# EAGLE board infra vector v2 (EAGLE 9.7.0)
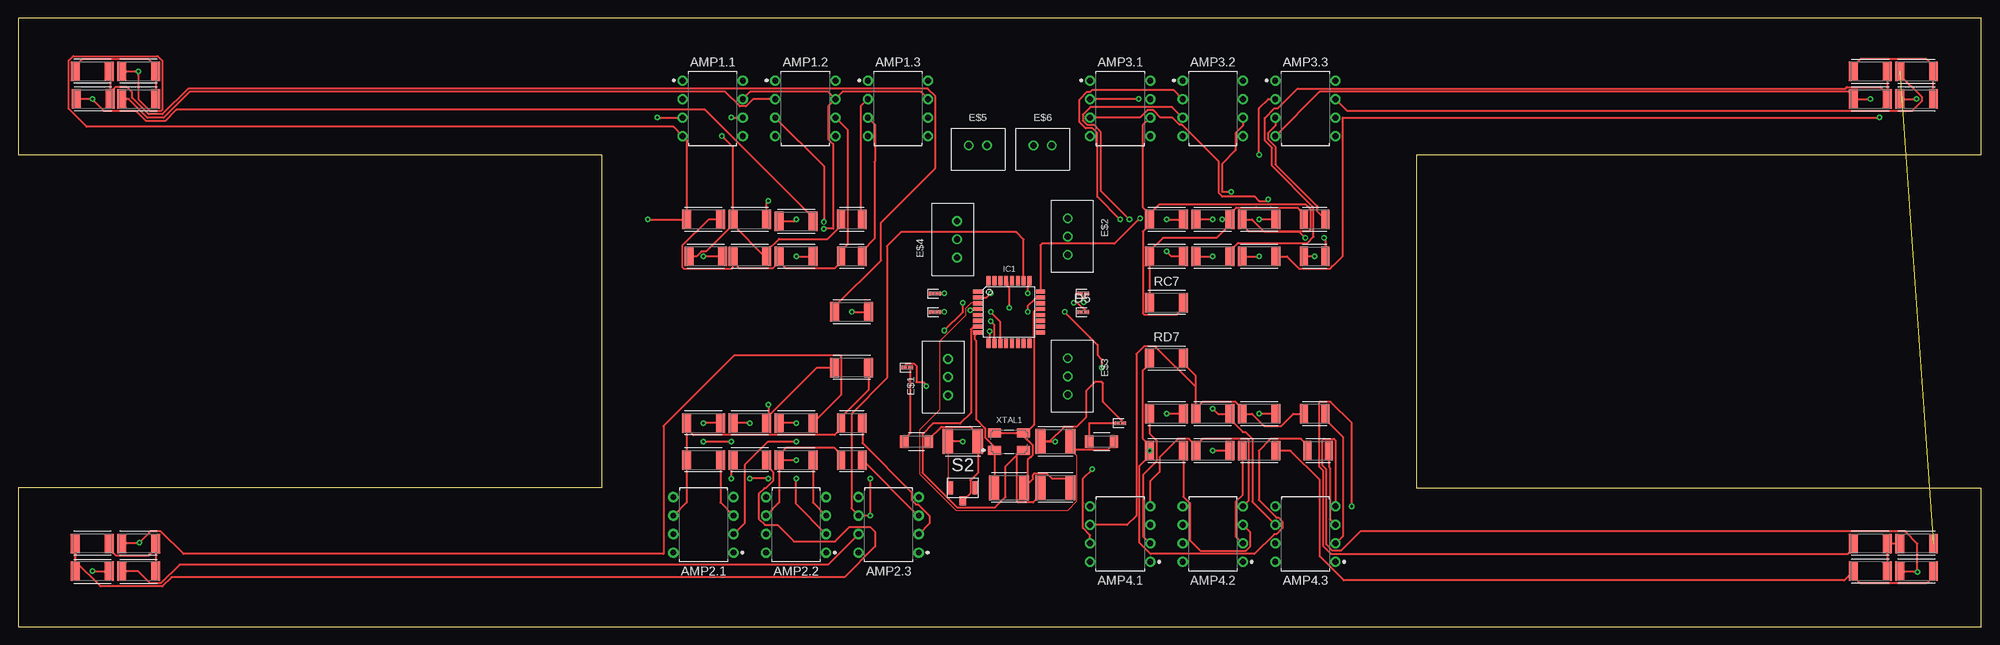
[diagram p0: board, top side]
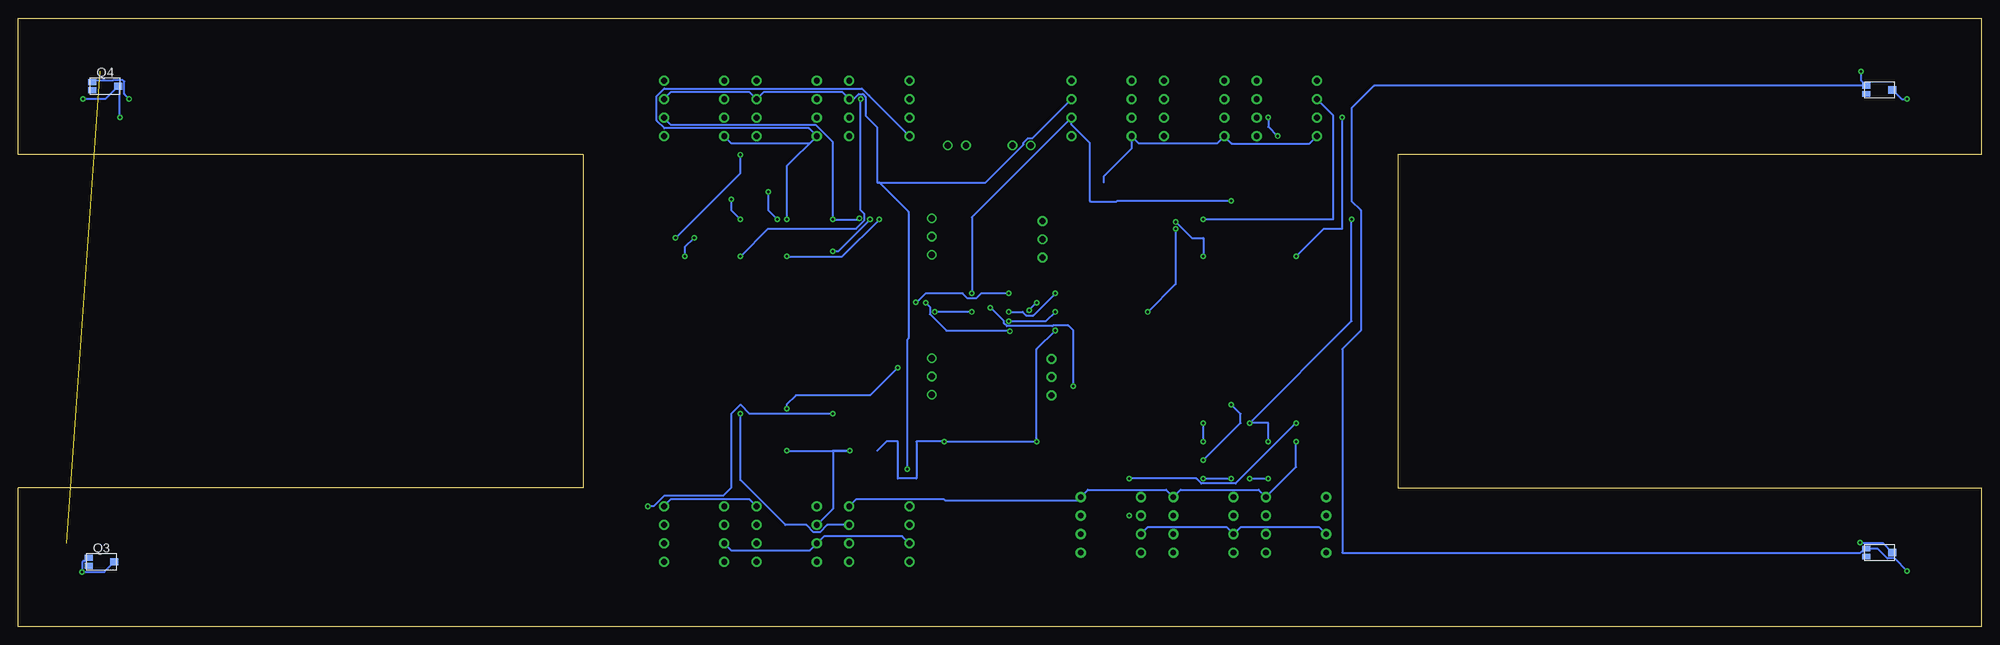
[diagram p1: board, bottom side, seen from below]

Size 269.22 x 83.49 mm. Coordinates in mm from the lower left corner, seen from the top.
Outline: 0,0 269.22,0 269.22,19.05 191.77,19.05 191.77,64.77 269.22,64.77 269.22,83.49 0,83.49 0,64.77 80.01,64.77 80.01,19.05 0,19.05 0,0
Copper layers (1*16): Top / Bottom
Stack-up Default Layer Stack: Top User Defined 0.035mm / Dielectric-1 User Defined 1.5mm / Bottom User Defined 0.035mm
Design rules: minimum copper width 6mil, minimum drill size 0.35mm, copper clearance wire_polygon to wire_polygon 6mil, copper clearance wire_polygon to pad_smd 6mil, copper clearance wire_polygon to via 6mil, copper clearance pad_smd to pad_smd 6mil, copper clearance pad_smd to via 6mil, copper clearance via to via 6mil, copper clearance smd to pad (same net) 6mil, copper clearance smd to via (same net) 6mil, copper clearance smd to smd (same net) 6mil, dimension clearance 40mil, via restrict clearance 0mil, restrict clearance 0mil, drill distance 6mil, keepout clearance 0mil

## Footprints (pad centres in the part's own frame; a part is rotated, then mirrored left to right if it is on the bottom)
DIP826W53P254L959H508Q8B = drill 0.786 pad 1.386: 1 -4.13,3.81; 2 -4.13,1.27; 3 -4.13,-1.27; 4 -4.13,-3.81; 5 4.13,-3.81; 6 4.13,-1.27; 7 4.13,1.27; 8 4.13,3.81
CAPC4532X135 = smd 1.397 x 3.415: 1 -2.057,0; 2 2.057,0
LEDC1005X25N_FLAT-R = smd 0.7 x 0.5: A 0.45,0; C -0.45,0
B3B-XH-A = drill 0.84: 1 0,0; 2 2.5,0; 3 5,0
B2B-XH-A = drill 0.84: 1 0,0; 2 2.5,0
TQFP32-08 = smd 1.27 x 0.559: 1 -4.293,2.8; 2 -4.293,2; 3 -4.293,1.2; 4 -4.293,0.4; 5 -4.293,-0.4; 6 -4.293,-1.2; 7 -4.293,-2; 8 -4.293,-2.8; 17 4.293,-2.8; 18 4.293,-2; 19 4.293,-1.2; 20 4.293,-0.4; 21 4.293,0.4; 22 4.293,1.2; 23 4.293,2; 24 4.293,2.8 | smd 0.559 x 1.27: 9 -2.8,-4.293; 10 -2,-4.293; 11 -1.2,-4.293; 12 -0.4,-4.293; 13 0.4,-4.293; 14 1.2,-4.293; 15 2,-4.293; 16 2.8,-4.293; 25 2.8,4.293; 26 2,4.293; 27 1.2,4.293; 28 0.4,4.293; 29 -0.4,4.293; 30 -1.2,4.293; 31 -2,4.293; 32 -2.8,4.293
1206_TEMT6000X01 = smd 1.1 x 0.8: P$1 -1.77,0.55; P$2 -1.77,-0.55 | smd 1.1 x 1: P$3 1.78,0
RESC3224X71 = smd 1.131 x 2.66: 1 -1.47,0; 2 1.47,0
RESC5025X71 = smd 1.231 x 2.67: 1 -2.32,0; 2 2.32,0
RESMELF3515 = smd 1.153 x 1.737: 1 -1.681,0; 2 1.681,0
B3U-1100P(M) = smd 0.8 x 1.8: 1 1.75,0; 2 -1.75,0 | smd 0.9 x 1.2: 3 0,-1.8
OSCSC500X320X110-4N = smd 1.8 x 1.2: 1 -2,-1.2; 2 2,-1.2; 3 2,1.2; 4 -2,1.2

## Placement (x,y rotation side)
AMP1.1  OPAMP_DIP  [DIP826W53P254L959H508Q8B]  95.25,71.12 0 top
AMP1.2  OPAMP_DIP  [DIP826W53P254L959H508Q8B]  107.95,71.12 0 top
AMP1.3  OPAMP_DIP  [DIP826W53P254L959H508Q8B]  120.65,71.12 0 top
AMP2.1  OPAMP_DIP  [DIP826W53P254L959H508Q8B]  93.98,13.97 180 top
AMP2.2  OPAMP_DIP  [DIP826W53P254L959H508Q8B]  106.68,13.97 180 top
AMP2.3  OPAMP_DIP  [DIP826W53P254L959H508Q8B]  119.38,13.97 180 top
AMP3.1  OPAMP_DIP  [DIP826W53P254L959H508Q8B]  151.13,71.12 0 top
AMP3.2  OPAMP_DIP  [DIP826W53P254L959H508Q8B]  163.83,71.12 0 top
AMP3.3  OPAMP_DIP  [DIP826W53P254L959H508Q8B]  176.53,71.12 0 top
AMP4.1  OPAMP_DIP  [DIP826W53P254L959H508Q8B]  151.13,12.7 180 top
AMP4.2  OPAMP_DIP  [DIP826W53P254L959H508Q8B]  163.83,12.7 180 top
AMP4.3  OPAMP_DIP  [DIP826W53P254L959H508Q8B]  176.53,12.7 180 top
CPOWER  [CAPC4532X135]  142.24,25.4 0 top
CRESET  [CAPC4532X135]  129.54,25.4 0 top
CRYSTALC1  [CAPC4532X135]  142.24,19.05 0 top
CRYSTALC2  [CAPC4532X135]  135.89,19.05 0 top
D1  LED_RED  [LEDC1005X25N_FLAT-R]  151.13,27.94 0 top
D2  LED_RED  [LEDC1005X25N_FLAT-R]  121.92,35.56 0 top
D3  LED_RED  [LEDC1005X25N_FLAT-R]  125.73,45.72 0 top
D4  LED_RED  [LEDC1005X25N_FLAT-R]  125.73,43.18 0 top
D5  LED_RED  [LEDC1005X25N_FLAT-R]  146.05,43.18 0 top
D6  LED_RED  [LEDC1005X25N_FLAT-R]  146.05,45.72 0 top
E$1  [B3B-XH-A]  127.5,31.75 90 top
E$2  [B3B-XH-A]  143.93,56.03 270 top
E$3  [B3B-XH-A]  143.93,36.83 270 top
E$4  [B3B-XH-A]  128.77,50.65 90 top
E$5  [B2B-XH-A]  130.35,66.04 0 top
E$6  [B2B-XH-A]  139.24,66.04 0 top
IC1  ATMEGA328P  [TQFP32-08]  135.89,43.18 0 top
Q1  TEMT6000  [1206_TEMT6000X01]  13.97,10.16 0 bottom
Q2  TEMT6000  [1206_TEMT6000X01]  13.97,73.66 0 bottom
Q3  TEMT6000  [1206_TEMT6000X01]  257.81,8.89 0 bottom
Q4  TEMT6000  [1206_TEMT6000X01]  257.32,74.16 0 bottom
R32  [RESC3224X71]  177.8,29.21 0 top
R33  [RESC3224X71]  178.29,24.13 0 top
R45  [RESC3224X71]  177.8,50.8 0 top
R46  [RESC3224X71]  177.8,55.88 0 top
RA1  [RESC5025X71]  93.98,55.88 0 top
RA2  [RESC5025X71]  100.33,55.88 0 top
RA3  [RESC5025X71]  106.68,55.6 0 top
RA4  [RESC5025X71]  94.31,50.8 0 top
RA5  [RESC5025X71]  16.51,72.39 0 top
RA6  [RESC5025X71]  106.68,50.8 0 top
RA7  [RESC3224X71]  114.3,55.88 0 top
RA8  [RESC3224X71]  114.3,50.8 0 top
RA9  [RESC5025X71]  114.3,43.18 0 top
RA10  [RESC5025X71]  100.33,50.8 0 top
RAQ1  [RESC5025X71]  10.16,76.2 0 top
RAQ2  [RESC5025X71]  10.28,72.39 0 top
RAQ3  [RESC5025X71]  16.51,76.2 0 top
RB1  [RESC5025X71]  93.98,27.94 0 top
RB2  [RESC5025X71]  100.33,27.94 0 top
RB3  [RESC5025X71]  106.68,27.94 0 top
RB4  [RESC5025X71]  93.98,22.86 0 top
RB5  [RESC5025X71]  100.33,22.86 0 top
RB6  [RESC5025X71]  106.68,22.86 0 top
RB7  [RESC3224X71]  114.3,27.94 0 top
RB8  [RESC3224X71]  114.3,22.86 0 top
RB9  [RESC5025X71]  114.3,35.56 0 top
RC1  [RESC5025X71]  170.18,50.8 0 top
RC2  [RESC5025X71]  157.48,55.88 0 top
RC3  [RESC5025X71]  163.83,55.88 0 top
RC4  [RESC5025X71]  170.18,55.88 0 top
RC5  [RESC5025X71]  163.83,50.8 0 top
RC6  [RESC5025X71]  157.48,50.8 0 top
RC7  [RESC5025X71]  157.48,44.45 0 top
RD1  [RESC5025X71]  157.48,29.21 0 top
RD2  [RESC5025X71]  163.83,29.21 0 top
RD3  [RESC5025X71]  170.18,29.21 0 top
RD4  [RESC5025X71]  170.18,24.13 0 top
RD5  [RESC5025X71]  157.48,24.13 0 top
RD6  [RESC5025X71]  163.83,24.13 0 top
RD7  [RESC5025X71]  157.48,36.83 0 top
RP  [RESMELF3515]  148.59,25.4 0 top
RQB1  [RESC5025X71]  10.16,11.43 0 top
RQB2  [RESC5025X71]  10.16,7.62 180 top
RQB3  [RESC5025X71]  16.51,11.43 0 top
RQB4  [RESC5025X71]  16.51,7.62 180 top
RQC1  [RESC5025X71]  254,76.2 180 top
RQC2  [RESC5025X71]  254,72.39 0 top
RQC3  [RESC5025X71]  260.35,72.39 0 top
RQC4  [RESC5025X71]  260.35,76.2 180 top
RQD1  [RESC5025X71]  254,11.43 0 top
RQD2  [RESC5025X71]  254,7.62 0 top
RQD3  [RESC5025X71]  260.35,7.62 0 top
RQD4  [RESC5025X71]  260.35,11.43 0 top
RRESET  [RESMELF3515]  123.19,25.4 0 top
S2  B3U-1100P(M)  [B3U-1100P(M)]  129.54,19.05 0 top
XTAL1  8MHZ  [OSCSC500X320X110-4N]  135.89,25.4 0 top

## Library data of the parts
AMP1.1-AMP1.3 AMP2.1-AMP2.3 AMP3.1-AMP3.3 AMP4.1-AMP4.3 = Tinkercad
CPOWER CRESET CRYSTALC1 CRYSTALC2 = Capacitor; CATEGORY: Capacitor
D1-D6 = LED; CATEGORY: LED; COLOR: RED; DESCRIPTION: CHIP LED FLAT; SUB-CATEGORY: CHIP; TYPE: FLAT_TOP
E$1-E$6 = Connector
IC1 = IC_Embedded; CATEGORY: IC_Embedded; MANUFACTURER: Microchip; MPN: ATmega328P-MMH; OPERATING_TEMP: -40 to 85 °C; PART_STATUS: Active; SUB-CATEGORY: Microcontroller
Q1-Q4 = Sensor; CATEGORY: SENSOR; DESCRIPTION: Ambient Light Sensor, RoHS Compliant, Released for Lead (Pb)-free Solder Process, AEC-Q101 Released; MANUFACTURER: Vishay Semiconductors; MPN: TEMT6000X01; OPERATING_TEMPERATURE: - 40 to + 100 °C; PART_STATUS: ACTIVE; ROHS_COMPLIANT: RoHS COMPLIANT; SERIES: TEMT; SUB-CATEGORY: Ambient Light Sensor
R32 R33 R45 R46 RA7 RA8 RB7 RB8 = Tutorial - Fusion 360; CATEGORY: Resistor; SUB-CATEGORY: Fixed
RA1-RA6 RA9 RA10 RAQ1-RAQ3 RB1-RB6 RB9 RC1-RC7 RD1-RD7 RP RQB1-RQB4 RQC1-RQC4 RQD1-RQD4 RRESET = Resistor; CATEGORY: Resistor; SUB-CATEGORY: Fixed
S2 = Switch; CATEGORY: SWITCH; DESCRIPTION: Ultra-small Surface-mounting Tactile Switches with High Contact Reliability; MANUFACTURER: OMRON; OPERATING_TEMPERATURE: -25°C to +70°C at 60%RH max; PART_STATUS: ACTIVE; ROHS_COMPLIANCE: RoHS Compliant; SERIES: B3U; TYPE: Tactile
XTAL1 = Frequency-Source; CATEGORY: Crystals; MAUFACTURER: Abracon LLC; MPN: ABM3B-8.000MHZ-B2-T; OPERATING_TEMPERATURE: -20°C ~ 70°C; PART_STATUS: ACIVE; ROHS_COMPLIANT: COMPLIANT; SERIES: ABM3B; SUB_CATEGORY: Crystals 4-SMD; TYPE: Crystal Surface Mount

## Nets
AREF: IC1.20
AVCC: IC1.18
N$1: RQB1.2 RQB3.2 RQB4.1
N$2: RB5.2 RQB1.1 RQB2.2
N$3: CRYSTALC1.1 IC1.7 XTAL1.2
N$4: Q1.P$3 RB3.2 RQB3.1
N$5: AMP2.1.2 RB3.1
N$6: AMP2.2.2 RB5.1
N$7: AMP2.3.2 RB7.2
N$8: AMP2.3.3 RB8.2
N$9: AMP2.1.6 RB1.1 RB4.1 RB7.1 RB9.2
N$10: AMP2.2.6 RB2.2 RB6.1 RB8.1 RB9.1
N$11: AMP2.1.3 RB4.2
N$12: AMP2.2.3 RB6.2
N$13: AMP2.3.6 IC1.26 RB1.2
N$14: RA5.2 RAQ1.1 RAQ3.2
N$15: CRYSTALC2.1 IC1.8 XTAL1.1
N$16: Q2.P$3 RA3.2 RAQ2.1
N$17: AMP1.1.2 RA3.1
N$18: AMP1.2.2 RA5.1
N$19: AMP1.3.2 RA7.2
N$20: AMP1.3.3 RA8.2
N$21: AMP1.1.6 RA2.1 RA4.1 RA7.1 RA10.2
N$22: AMP1.2.6 RA1.2 RA6.1 RA8.1 RA10.1
N$23: AMP1.1.3 RA4.2
N$24: AMP1.2.3 RA6.2
N$25: AMP1.1.7 AMP1.2.7 AMP1.3.7 AMP3.1.7 AMP3.2.7 AMP3.3.7 AMP4.1.7 AMP4.2.7 AMP4.3.7 RA9.2 RQC4.2 RQD4.2
N$26: RA9.1 RAQ1.2 RAQ2.2
N$27: AMP1.3.6 IC1.25 RA2.2
N$28: AMP1.1.4 AMP1.2.4 AMP1.3.4 AMP2.1.4 AMP2.2.4 AMP2.3.4 AMP4.1.4 AMP4.2.4 AMP4.3.4 Q1.P$1 Q2.P$1 Q3.P$1 Q3.P$3 RA1.1 RAQ3.1 RB2.1 RD6.1 RQB2.1 RQD3.1
N$29: RD4.2 RQD2.1 RQD3.2
N$30: CRYSTALC1.2 CRYSTALC2.2 IC1.21 XTAL1.3 XTAL1.4
N$31: AMP4.1.2 RD1.1
N$32: AMP4.2.2 RD4.1
N$33: AMP4.3.2 R32.2
N$34: AMP4.3.3 R33.2
N$35: AMP4.1.6 R32.1 RD2.1 RD3.1 RD7.2
N$36: AMP4.2.6 R33.1 RD5.1 RD6.2 RD7.1
N$37: AMP4.1.3 RD3.2
N$38: AMP4.2.3 RD5.2
N$39: CPOWER.1 CRESET.1 D1.A IC1.4 S2.2
N$40: RQD1.2 RQD2.2 RQD4.1
N$41: AMP4.3.6 IC1.23 RD2.2
N$42: CPOWER.2 IC1.3 RP.2
N$43: RC5.2 RQC1.1 RQC2.2
N$44: Q4.P$3 RC1.2 RQC3.1
N$45: AMP3.1.2 RC1.1
N$46: AMP3.2.2 RC5.1
N$47: AMP3.3.2 R45.2
N$48: AMP3.3.3 R46.2
N$49: AMP3.1.6 R45.1 RC2.1 RC4.1 RC7.2
N$50: AMP3.2.6 R46.1 RC3.2 RC6.1 RC7.1
N$51: AMP3.1.3 RC4.2
N$52: AMP3.2.3 RC6.2
N$53: D1.C RP.1
N$54: RQC1.2 RQC3.2 RQC4.1
N$55: AMP3.3.6 IC1.24 RC2.2
N$56: AMP3.1.4 AMP3.2.4 AMP3.3.4 Q4.P$1 RC3.1 RQC2.1
N$57: RD1.2 RQD1.1
N$58: D2.A RRESET.1
N$59: D2.C IC1.29
N$60: CRESET.2 RRESET.2 S2.3
N$61: D6.A IC1.2
N$62: D5.A IC1.9
N$63: D4.A IC1.10
N$64: D3.A IC1.11
N$65: AMP2.1.7 AMP2.2.7 AMP2.3.7 RQB4.2
N$66: D3.C
N$67: D4.C
N$68: D5.C
N$69: D6.C
VCC1: IC1.6

## Tracks (layer width: path | path; a pad name or v marks a point on that pad's centre or on a via)
N$1
  Top 0.305: RQB1.2 12.48,10.71 13.4,9.79 17.91,9.79 18.83,10.71 RQB3.2 RQB4.1
N$2
  Top 0.305: RQB2.2 RQB1.1 7.84,8.97 11.29,5.52 19.76,5.52 21.03,6.79 113.29,6.79 117.52,11.02 117.52,12.98 116.81,13.7 114.03,13.7 112.03,11.7 106.39,11.7 104.12,13.97 102.41,13.97 101.55,14.83 101.55,18.19 102.34,18.98 102.5,18.98 103.55,20.04 103.55,21.24 102.65,22.14 RB5.2
N$3
  Top 0.305: IC1.7 131.03,41.18 130.66,40.81 130.66,29.36 129.17,27.87 125.47,27.87 123.99,26.39 123.99,21.12 128.76,16.34 133.97,16.34 135.42,17.8 135.42,22.03 136.94,23.55 | CRYSTALC1.1 140.18,18.04 139.18,17.04 137.12,17.04 136.94,17.22 136.94,23.55 | 136.94,23.55 137.59,24.2 XTAL1.2
N$4  (via drill 0.35)
  Top 0.305: RQB3.1 16.51,11.43 v16.62,11.54 17.91,12.83 17.91,12.89 18.09,13.07 19.57,13.07 22.67,9.97 88.48,9.97 88.48,27.53 98.15,37.2 112.72,37.2 112.9,37.02 112.9,31.84 RB3.2
  Bottom 0.305: Q1.P$3 13.46,11.43 16.51,11.43 v16.62,11.54
N$5  (via drill 0.35)
  Top 0.305: v106.68,27.94 RB3.1 | v106.68,25.4 102.81,25.4 99.65,22.24 99.65,14.24 AMP2.1.2
  Bottom 0.305: v106.68,25.4 v106.68,27.94
N$6  (via drill 0.35)
  Top 0.305: AMP2.2.2 106.68,16.83 v106.68,20.32 | v102.87,20.32 v100.33,20.32 | v97.79,20.32 97.79,22.64 RB5.1
  Bottom 0.305: v106.68,20.32 v102.87,20.32 | v100.33,20.32 v97.79,20.32
N$7
  Top 0.305: AMP2.3.2 124.97,14.16 124.97,15.2 123.38,16.78 123.1,16.78 122.51,17.37 122.51,18.44 115.77,25.19 RB7.2
N$8
  Top 0.305: AMP2.3.3 123.39,15.24 RB8.2
N$9
  Top 0.305: RB9.2 116.62,32.49 112.83,28.7 RB7.1 112.83,27.18 111.96,26.3 92.58,26.3 91.66,27.22 RB1.1 RB4.1 91.66,17.05 AMP2.1.6
N$10  (via drill 0.35)
  Top 0.305: RB9.1 109.55,35.56 102.65,28.66 RB2.2 102.87,28.16 v102.87,30.48 | RB8.1 112.83,23.62 111.96,24.5 105.28,24.5 104.36,23.58 RB6.1 | RB6.1 104.36,17.05 AMP2.2.6 | RB6.1 v106.68,22.86
  Bottom 0.305: v106.68,22.86 101.6,27.94 101.6,29.21 v102.87,30.48
N$11
  Top 0.305: RB4.2 96.3,17.05 AMP2.1.3
N$12
  Top 0.305: RB6.2 109,17.05 AMP2.2.3
N$13  (via drill 0.35)
  Top 0.305: IC1.26 137.89,53.12 136.88,54.13 121.06,54.13 119.14,52.21 119.14,34.11 114.25,29.22 114.25,16.24 AMP2.3.6 v116.84,15.24 v116.84,20.32 | RB1.2 v93.98,27.94
  Bottom 0.305: v116.84,20.32 107.65,20.32 106.96,19.64 102.28,19.64 v93.98,27.94
N$14
  Top 0.305: RAQ1.1 7.84,76.92 8.76,77.84 17.91,77.84 18.83,76.92 RAQ3.2 RA5.2
N$15
  Top 0.305: CRYSTALC2.1 133.89,19.11 XTAL1.1 133.89,24.67 132.6,25.96 132.6,27.23 131.41,28.42 131.41,39.22 131.24,39.4 131.24,40.02 IC1.8
N$16  (via drill 0.35)
  Top 0.305: RAQ2.1 v10.16,72.39 11.8,70.75 16.15,70.75 17.52,69.38 20.14,69.38 21.7,70.94 94.17,70.94 109,56.1 RA3.2
  Bottom 0.305: Q2.P$3 10.92,72.39 v10.16,72.39
N$17  (via drill 0.35)
  Top 0.305: v106.68,55.88 106.4,55.6 RA3.1
  Bottom 0.305: AMP1.1.2 88.9,70.17 88.9,55.88 v106.68,55.88
N$18
  Top 0.305: AMP1.2.2 100.79,72.39 99.79,71.39 98.97,71.39 96.97,73.39 23.5,73.39 19.95,69.84 17.71,69.84 15.16,72.39 RA5.1
N$19
  Top 0.305: AMP1.3.2 115.52,71.39 115.52,56.13 RA7.2
N$20
  Top 0.305: AMP1.3.3 117.52,68.85 117.52,63.88 117.43,63.79 117.43,53.23 115.77,51.56 RA8.2
N$21  (via drill 0.35)
  Top 0.305: 98.01,55.16 102.37,50.8 RA10.2 102.65,51.52 104.33,53.2 110.99,53.2 112.83,55.03 RA7.1 | 98.01,55.16 RA2.1 98.01,65.82 v96.52,67.31 | v97.79,69.85 AMP1.1.6 | 98.01,55.16 94.33,51.48 93.7,51.48 93.01,50.8 RA4.1
  Bottom 0.305: v97.79,69.85 97.79,68.58 v96.52,67.31
N$22
  Top 0.305: AMP1.2.6 113.7,68.23 113.7,52.44 112.83,51.56 | 112.83,51.56 RA8.1 | 104.36,50.08 RA6.1 104.36,50.08 | 104.36,50.08 103.44,49.16 98.93,49.16 98.01,50.08 RA10.1 98.01,49.31 97.86,49.16 91.25,49.16 91.07,49.34 91.07,52.26 94.69,55.88 RA1.2 | RA8.1 112.83,50.04 111.96,49.16 105.28,49.16 104.36,50.08 | 112.83,51.56 RA8.1
N$23  (via drill 0.35)
  Top 0.305: RA4.2 v93.98,50.8 | v87.63,69.85 AMP1.1.3
  Bottom 0.305: v93.98,50.8 90.17,54.61 87.63,54.61 v87.63,69.85
N$24  (via drill 0.35)
  Top 0.305: AMP1.2.3 110.49,63.18 v110.49,55.52 | v106.68,50.8 RA6.2
  Bottom 0.305: v106.68,50.8 106.68,53.34 108.25,53.34 110.21,55.29 110.26,55.29 v110.49,55.52
N$25  (via drill 0.35)  (1 unrouted)
  Top 0.305: AMP1.2.7 111.08,73.39 100.38,73.39 AMP1.1.7 | AMP1.3.7 123.78,73.39 113.08,73.39 AMP1.2.7 | AMP4.1.7 147,12.56 146,13.56 146,16.92 146.05,16.97 146.05,20.32 v147.32,21.59 | RQC4.2 258.03,75.7 261.03,72.69 261.03,72.11 259.68,70.75 182.3,70.75 AMP3.3.7 | AMP1.2.7 111.08,71.39 111.08,66.9 111.76,66.22 111.76,54.61 v110.49,54.61 | v114.3,43.18 RA9.2
  Bottom 0.305: AMP4.1.7 148,12.43 158.7,12.43 AMP4.2.7 160.7,10.43 171.4,10.43 AMP4.3.7 | 151.41,60.96 151.13,60.96 147.12,56.95 147.12,39.57 147.32,39.37 v147.32,21.59 | v110.49,54.61 110.49,46.99 v114.3,43.18 | AMP3.3.7 179.66,73.39 168.96,73.39 AMP3.2.7 166.96,73.39 156.26,73.39 AMP3.1.7 154.64,72.39 153.95,73.07 153.39,73.07 152.99,72.67 152.99,70.12 151.41,68.54 151.41,60.96 | AMP1.3.7 130.15,67.02 130.76,67.02 131.33,66.45 131.33,66.18 136.55,60.96 151.41,60.96
N$26
  Top 0.305: RAQ1.2 12.6,76.08 RAQ2.2 12.6,73.33 13.3,74.03 14.93,74.03 15.63,73.34 15.63,72.56 17.9,70.29 19.76,70.29 23.31,73.84 124.74,73.84 125.78,72.8 125.78,62.92 118.33,55.48 118.33,50.25 111.98,43.9 RA9.1
N$27  (via drill 0.35)
  Top 0.305: RA2.2 102.65,58.2 v102.87,58.42 | v138.43,45.72 138.43,46.67 138.47,46.71 138.47,47.26 IC1.25
  Bottom 0.305: v102.87,58.42 118.51,58.42 118.67,58.27 122.07,58.27 122.25,58.44 122.25,66.37 124.78,68.9 AMP1.3.6 136.85,57.78 136.85,57.77 138.43,56.19 v138.43,45.72
N$28  (via drill 0.35)
  Top 0.305: 161.51,24.85 162.43,25.77 168.6,25.77 168.78,25.59 168.78,17.33 AMP4.2.4 | RD6.1 161.51,24.85 | 161.51,24.85 160.59,25.77 159.06,25.77 156.54,23.25 156.54,21.21 155.25,19.92 155.25,16.52 AMP4.1.4 | RQD3.1 260.35,7.62 v260.45,7.52 260.45,11.39 258.77,13.07 184.05,13.07 181.41,10.43 180.25,10.43 179.41,11.27 179.41,21.6 178.89,22.12 178.89,25.59 179.07,25.76 180.45,25.76 180.66,25.56 AMP4.3.4 | v10.16,7.62 RQB2.1 | RAQ3.1 v16.51,76.2 16.51,72.33 18.09,70.75 19.57,70.75 19.75,70.93 19.75,77.66 19.11,78.3 7.56,78.3 6.92,77.66 6.92,71.05 9.39,68.58 89.85,68.58 AMP1.1.4 91.66,66.77 RA1.1 v86.36,55.88 | v93.98,25.4 v97.79,25.4 | v100.33,27.94 RB2.1
  Bottom 0.305: Q3.P$1 259.98,9.04 260.26,9.04 260.44,8.87 260.44,7.54 v260.45,7.52 257.41,7.52 Q3.P$3 | v10.16,7.62 11.9,9.36 12.87,9.36 14.22,10.71 Q1.P$1 16.14,10.32 16.42,10.32 16.57,10.16 87.63,10.16 87.63,38.1 85.09,40.64 85.09,57.15 86.36,58.42 86.36,71.12 83.27,74.21 Q2.P$1 16.51,74.98 v16.51,76.2 | 120.37,60.96 120.37,61.78 116.52,65.62 AMP1.3.4 115.52,66.31 104.82,66.31 AMP1.2.4 102.82,66.31 92.12,66.31 AMP1.1.4 | AMP4.1.4 154.26,17.51 142.3,17.51 142.09,17.3 123.99,17.3 AMP2.3.4 122.51,18.78 111.81,18.78 AMP2.2.4 109.81,18.78 99.11,18.78 AMP2.1.4 93.98,21.91 v93.98,25.4 | AMP4.3.4 179.66,17.51 168.96,17.51 AMP4.2.4 | v97.79,25.4 97.79,27.94 v100.33,27.94 86.36,41.91 v86.36,55.88
N$29
  Top 0.305: RQD3.2 262.67,6.9 261.75,5.98 252.6,5.98 251.68,6.9 RQD2.1 250.41,6.35 181.79,6.35 178.5,9.64 178.5,20.13 174.5,24.13 RD4.2
N$30
  Top 0.305: XTAL1.4 XTAL1.3 | CRYSTALC1.2 144.78,19.53 144.78,20.32 141.75,20.32 141.01,21.06 139.36,21.06 139.18,20.88 139.18,20.28 CRYSTALC2.2 138.43,19.53 138.43,22.86 138.87,23.29 138.92,23.29 139.09,23.47 139.09,24.93 137.89,26.13 XTAL1.3 | IC1.21 139.61,43.58 139.24,43.21 139.24,39.68 139.27,39.65 139.27,27.68 138.19,26.6 XTAL1.3
N$31
  Top 0.305: AMP4.1.2 154.26,12.43 154.26,20.85 156.08,22.67 156.08,25.59 155.16,26.51 RD1.1
N$32
  Top 0.305: RD4.1 167.86,18 166.96,17.1 166.96,12.43 AMP4.2.2
N$33
  Top 0.305: R32.2 179.27,28.44 181.66,26.06 181.66,12.43 AMP4.3.2
N$34
  Top 0.305: AMP4.3.3 179.87,14.76 179.87,21.79 179.76,21.9 R33.2
N$35
  Top 0.305: RD2.1 161.51,34.4 159.8,36.11 RD7.2 | RD2.1 161.51,32.86 155.9,38.47 154.42,38.47 153.35,37.4 153.35,15.24 152.08,13.97 AMP4.1.6 | RD2.1 161.51,29.93 162.43,30.85 166.94,30.85 167.86,29.93 RD3.1 169.21,29.21 170.85,27.57 173.24,27.57 174.88,29.21 R32.1
N$36  (via drill 0.35)
  Top 0.305: RD7.1 155.16,36.11 154.24,35.19 154.24,25.77 155.16,24.85 RD5.1 155.16,23.41 153.81,22.06 153.81,11.47 155.3,9.98 169.53,9.98 172.26,12.7 172.54,12.7 173.4,13.56 173.4,14.38 172.81,14.97 172.53,14.97 170.13,17.37 170.13,24.14 171.76,25.77 175.95,25.77 176.82,24.89 R33.1 | RD6.2 v163.83,24.13
  Bottom 0.305: AMP4.2.6 157.48,16.19 157.48,24.13 RD5.1 v163.83,24.13
  other vias: 155.16,24.13
N$37  (via drill 0.35)
  Top 0.305: RD3.2 v170.18,29.21
  Bottom 0.305: AMP4.1.3 158.29,13.97 159.29,12.97 160.11,12.97 161.11,13.97 164.01,13.97 170.18,20.14 v170.18,29.21
N$38
  Top 0.305: AMP4.2.3 168.96,12.97 168.96,11.02 168.37,10.43 162.11,10.43 160.7,11.84 160.7,16.92 159.8,17.82 RD5.2
N$39  (via drill 0.35)
  Top 0.152: CRESET.1 127.48,19.36 S2.2
  Top 0.305: v142.24,25.4 CPOWER.1 141.46,25.4 143.47,27.41 145.12,27.41 146.45,28.74 146.45,32.36 147.66,33.58 148.62,33.58 148.8,33.4 148.8,30.86 151.34,28.32 151.34,28.18 D1.A | v129.54,25.4 CRESET.1 | v127,40.64 129.54,43.18 v129.54,44.45 | v130.57,43.42 130.73,43.58 IC1.4
  Bottom 0.305: 151.41,24.13 150.14,25.4 148.59,25.4 148.59,20.32 146.05,20.32 146.05,25.4 v142.24,25.4 v129.54,25.4 129.54,38.1 v127,40.64 | v129.54,44.45 v130.57,43.42 130.81,43.18
N$40
  Top 0.305: RQD4.1 RQD1.2 RQD2.2
N$41  (via drill 0.35)
  Top 0.305: IC1.23 139.97,44.96 139.42,44.96 138.43,43.97 v138.43,43.18 | v148.59,35.56 148.59,36.69 148.03,37.25 148.03,38.66 v143.51,43.18 | v163.83,29.89 164.51,29.21 RD2.2 166.15,28.49 167.93,26.71 168.31,26.71 169.24,25.78 169.24,17.13 AMP4.3.6
  Bottom 0.305: v138.43,43.18 v143.51,43.18 | v148.59,35.56 152.4,31.75 162.56,31.75 163.83,30.48 v163.83,29.89
N$42
  Top 0.152: CPOWER.2 144.3,24.39 145.22,23.46 145.22,17.25 143.94,15.96 128.61,15.96 123.61,20.96 123.61,26.97 126.36,29.72 126.36,39.14 129.92,42.7 129.92,43.63 130.67,44.38 IC1.3
  Top 0.305: RP.2 150.27,25.11 149.39,24.23 144.46,24.23 144.3,24.39 CPOWER.2
N$43
  Top 0.305: RQC1.1 RQC2.2 256.32,73.11 255.4,74.03 250.8,74.03 250.62,73.84 175.45,73.84 172.73,71.12 172.26,71.12 170.94,69.81 170.94,66.71 171.94,65.71 171.94,63.24 177.66,57.53 177.66,53.5 176.81,52.66 167.29,52.66 166.15,51.52 RC5.2
N$44  (via drill 0.35)
  Top 0.305: RQC3.1 v260.35,72.39 | RC1.2 174,50.8 175.64,49.17 179.96,49.17 180.33,49.53 180.34,49.53 181.66,50.85 181.66,69.85 v255.27,69.85
  Bottom 0.305: v260.35,72.39 257.3,72.39 Q4.P$3 255.27,73.89 v255.27,69.85
N$45  (via drill 0.35)
  Top 0.305: RC1.1 v170.18,50.8 | v153.67,72.39 AMP3.1.2
  Bottom 0.305: v170.18,50.8 166.37,54.61 154.32,54.61 153.16,55.77 153.16,56.64 153.67,57.15 v153.67,72.39
N$46  (via drill 0.35)
  Top 0.305: RC5.1 v163.83,50.8 | v151.13,55.88 148,59.01 148,67.72 147.33,68.4 146.4,68.4 145.55,69.25 145.55,72.35 146.59,73.39 147.05,73.39 147.32,73.66 158.43,73.66 AMP3.2.2
  Bottom 0.305: v163.83,50.8 156.21,50.8 v151.13,55.88
N$47  (via drill 0.35)
  Top 0.305: R45.2 179.27,53.14 v179.07,53.34 | v170.18,64.77 170.18,71.12 171.45,72.39 AMP3.3.2
  Bottom 0.305: v179.07,53.34 170.18,62.23 v170.18,64.77
N$48
  Top 0.305: R46.2 178.12,57.03 178.12,57.72 172.4,63.43 172.4,65.9 171.4,66.9 171.4,67.72 172.4,68.72 AMP3.3.3
N$49  (via drill 0.35)
  Top 0.305: RC7.2 159.8,43.73 158.88,42.81 154.42,42.81 154.24,42.99 154.24,54.24 155.16,55.16 RC2.1 155.16,56.6 | 155.16,56.6 154.26,57.5 154.26,68.85 AMP3.1.6 | 155.16,56.6 156.54,57.98 169.98,57.98 169.99,57.96 171.55,57.96 171.57,57.98 176.56,57.98 177.2,57.34 177.2,54.42 177.02,54.24 168.78,54.24 167.86,55.16 RC4.1 169.21,55.88 170.85,54.24 175.63,54.24 v176.53,53.34 | v177.8,50.8 R45.1
  Bottom 0.305: v176.53,53.34 177.8,52.07 v177.8,50.8
N$50  (via drill 0.35)
  Top 0.305: RC7.1 RC6.1 155.16,51.52 156.98,53.34 164.33,53.34 166.15,55.16 RC3.2 | RC3.2 166.15,56.6 167.07,57.52 169.79,57.52 169.8,57.51 171.74,57.51 171.76,57.52 175.46,57.52 176.33,56.65 R46.1 | AMP3.2.6 167.96,68.72 166.96,67.72 166.96,65.36 165.1,63.5 165.1,59.69 v166.37,59.69 | v165.1,55.88 RC3.2
  Bottom 0.305: v166.37,59.69 166.37,57.15 v165.1,55.88
N$51  (via drill 0.35)
  Top 0.305: AMP3.1.3 153.85,69.85 154.85,70.85 155.67,70.85 156.67,69.85 158.29,69.85 159.29,68.85 159.57,68.85 164.64,63.78 164.64,59.5 165.14,59.01 169.59,59.01 170.18,58.42 171.21,58.42 v171.45,58.66 | RC4.2 v170.18,55.88
  Bottom 0.305: v171.45,58.66 171.45,57.15 v170.18,55.88
N$52  (via drill 0.35)
  Top 0.305: AMP3.2.3 158.25,71.31 147.04,71.31 146,70.26 146,69.44 146.59,68.85 147.52,68.85 148.46,67.91 148.46,59.83 v152.4,55.88 | RC6.2 158.16,50.8 v157.48,51.48
  Bottom 0.305: v152.4,55.88 156.8,51.48 v157.48,51.48
N$53
  Top 0.305: D1.C 146.91,27.94 RP.1
N$54
  Top 0.305: RQC1.2 251.68,76.92 252.6,77.84 261.75,77.84 262.67,76.92 RQC4.1 RQC3.2
N$55  (via drill 0.35)
  Top 0.305: IC1.24 140.18,52.33 140.4,52.55 150.34,52.55 v153.84,56.05 | v157.48,55.88 RC2.2
  Bottom 0.305: AMP3.3.6 179.65,68.84 159.82,68.84 157.48,66.5 v157.48,55.88 154.01,55.88 v153.84,56.05
N$56  (via drill 0.35)
  Top 0.305: v254,72.39 RQC2.1 251.68,73.11 251.4,73.39 178.48,73.39 AMP3.3.4 | v163.83,55.88 RC3.1
  Bottom 0.305: v254,72.39 254.68,73.07 254.68,74.78 254.86,74.96 256.21,74.96 256.25,74.93 259.08,74.93 259.09,74.92 Q4.P$1 | AMP3.2.4 160.77,68.38 180.6,68.38 181.66,69.44 181.66,72.8 180.62,73.84 153.51,73.84 152.53,72.86 152.53,72.84 AMP3.1.4 | AMP3.2.4 160.7,66.31 171.4,66.31 AMP3.3.4 | AMP3.2.4 163.83,63.18 v163.83,55.88
N$57  (via drill 0.35)
  Top 0.305: RD1.2 v157.48,29.21 | RQD1.1 251.68,10.71 250.94,9.98 180.06,9.98 178.95,11.08 178.95,21.41 178.4,21.97 178.4,30.67 178.58,30.85 179.96,30.85 182.88,27.93 v182.88,16.51
  Bottom 0.305: v157.48,29.21 168.91,29.21 170.18,30.48 171.45,29.21 171.45,19.05 172.53,17.96 180.62,17.96 182.07,16.51 v182.88,16.51
N$58
  Top 0.305: D2.A 122.37,26.55 121.51,25.69 RRESET.1
N$59  (via drill 0.35)
  Top 0.305: IC1.29 135.71,47.26 135.71,46.71 135.89,46.53 v135.89,43.77 | v124.52,33.02 124.3,33.25 124.3,33.4 124.12,33.58 123.16,33.58 123.16,35.8 122.85,36.11 121.89,36.11 121.72,35.94 121.72,35.81 D2.C
  Bottom 0.305: v124.52,33.02 124.52,40.64 125.2,41.32 127.28,41.32 127.38,41.23 133.63,41.23 134.03,41.63 134.03,41.91 v135.89,43.77
N$60
  Top 0.305: RRESET.2 124.87,25.69 126.59,27.41 130.59,27.41 131.6,26.41 CRESET.2 131.6,21.09 130.59,20.08 130.59,18.29 S2.3
N$61  (via drill 0.35)
  Top 0.305: IC1.2 132.81,45.18 v133.35,45.72 | D6.A 146.25,45.47 146.25,45.34 146.12,45.21 v146.12,44.52
  Bottom 0.305: v133.35,45.72 137.16,45.72 137.84,45.04 139.02,45.04 139.7,45.72 144.78,45.72 145.98,44.52 v146.12,44.52
N$62  (via drill 0.35)
  Top 0.305: v144.78,44.45 145.23,44.45 145.94,43.73 146.08,43.73 146.25,43.56 146.25,43.42 D5.A | IC1.9 133.31,39.1 133.31,40.44 v133.21,40.54
  Bottom 0.305: v144.78,44.45 144.19,43.86 144.19,42.9 141.94,40.64 133.3,40.64 v133.21,40.54
N$63  (via drill 0.35)
  Top 0.305: IC1.10 133.89,41.37 v133.35,41.91 | v127,43.18 D4.A
  Bottom 0.305: v133.35,41.91 128.27,41.91 v127,43.18
N$64  (via drill 0.35)
  Top 0.305: IC1.11 134.69,41.84 v133.35,43.18 | D3.A v127,45.72
  Bottom 0.305: v133.35,43.18 131.46,43.18 131,42.72 130,42.72 v127,45.72
N$65
  Top 0.305: AMP2.3.7 111.07,8.52 22.11,8.52 19.57,5.98 18.09,5.98 16.45,7.62 RQB4.2
  Bottom 0.305: AMP2.1.7 90.85,13.7 101.55,13.7 AMP2.2.7 103.55,13.7 114.25,13.7 AMP2.3.7